# Altium PCB PCB1.PcbDoc
Units mm, origin at the board's own origin, x right, y up, seen from the top; angles counter-clockwise.
Board outline 20 x 45 mm, 2 copper layers (Top Layer, Bottom Layer); 9 components, 5 nets, 27 pads, 5 vias.
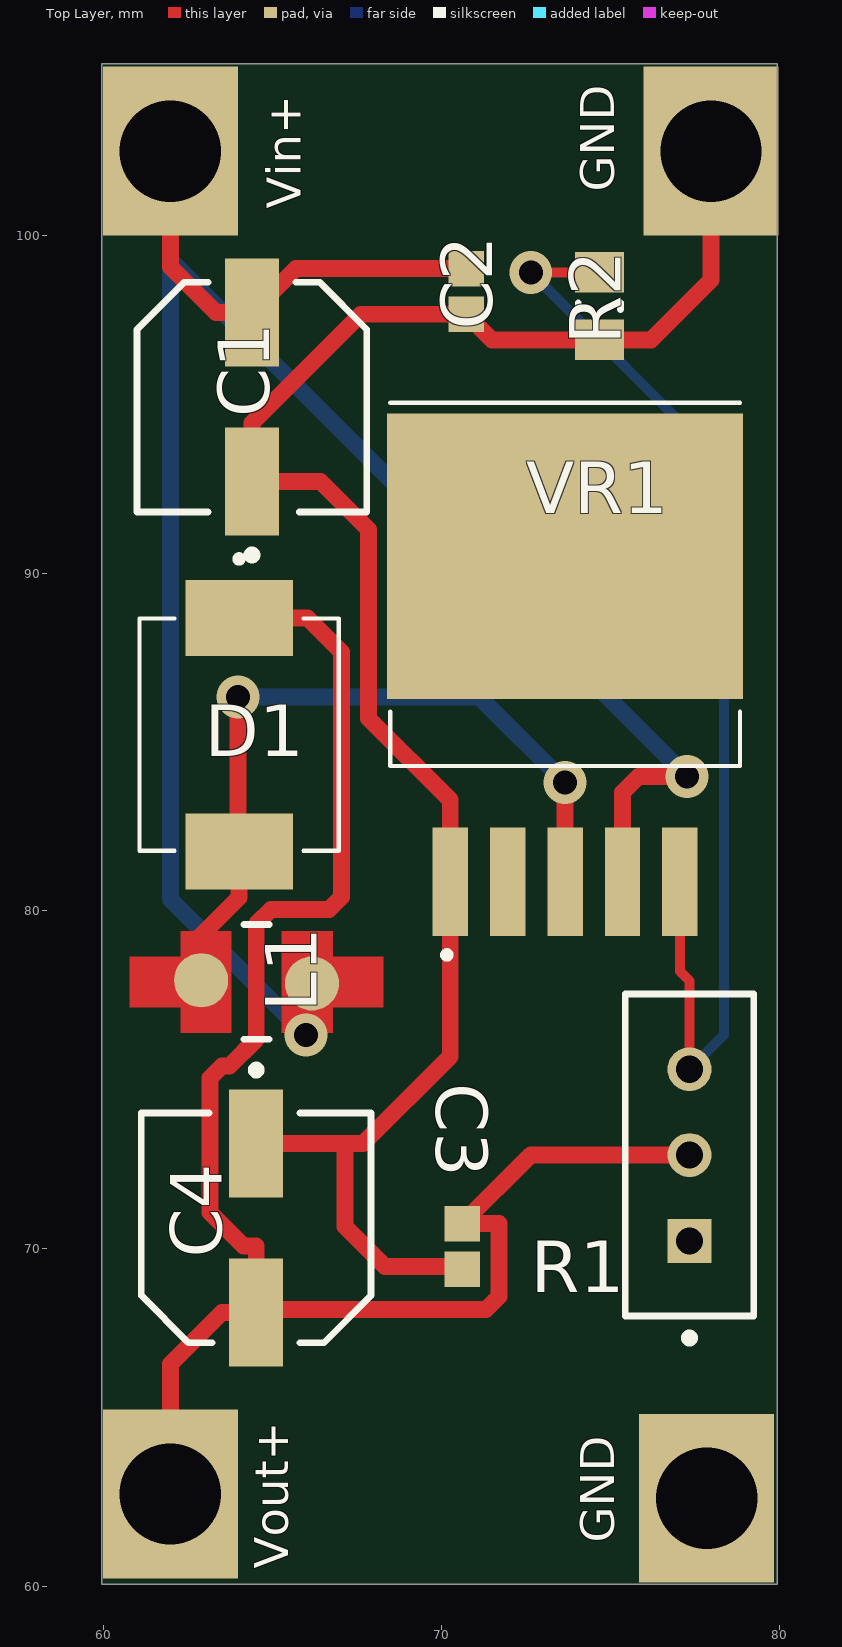
[diagram p0: Top Layer view]
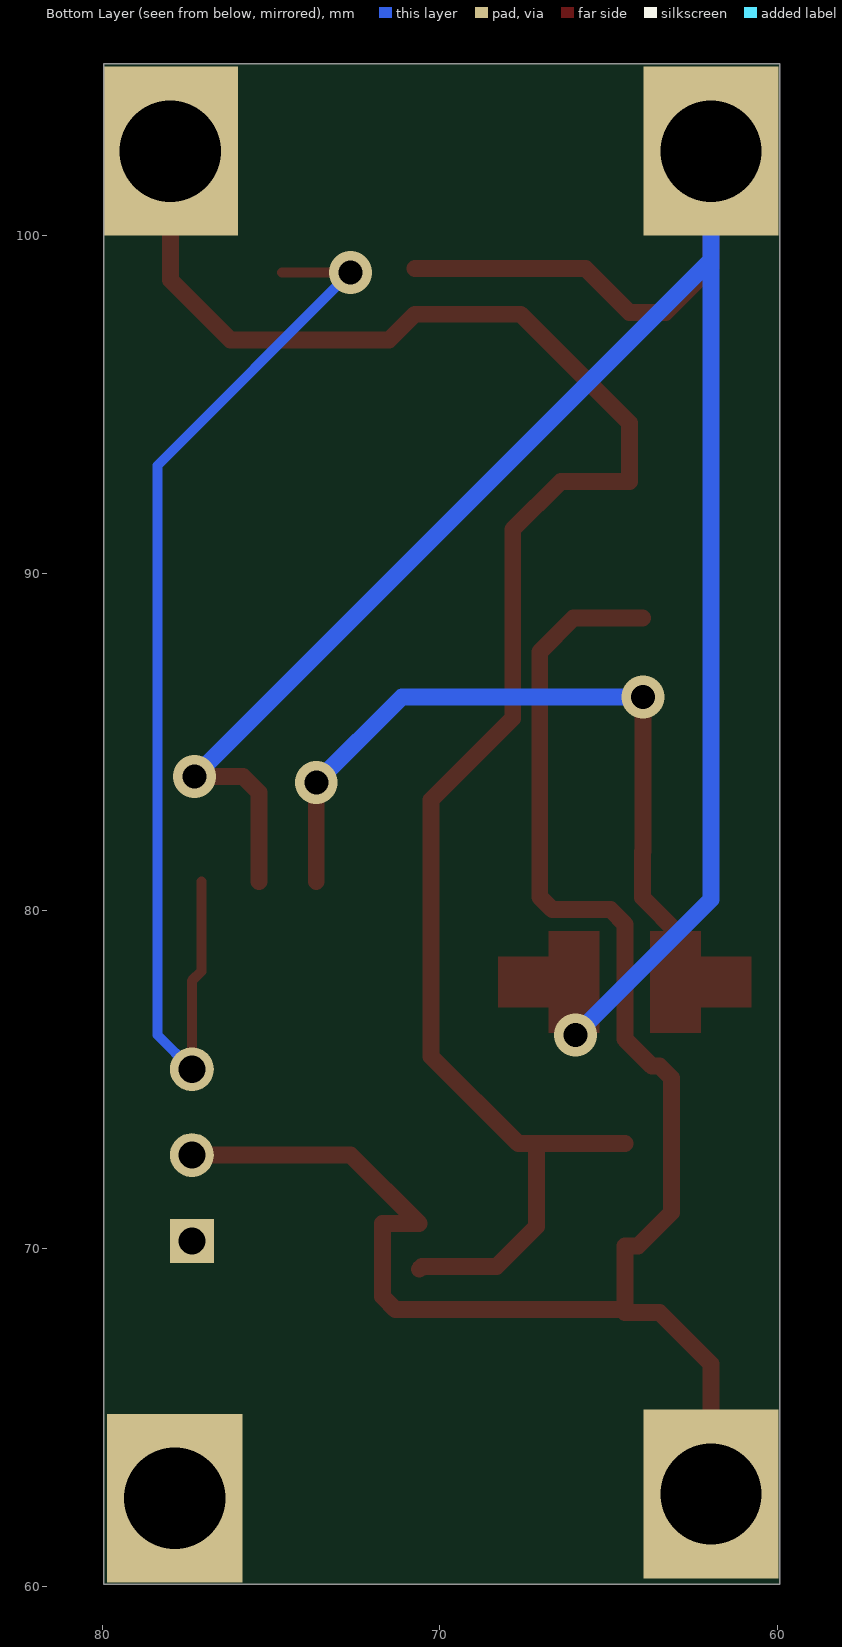
[diagram p1: Bottom Layer view, seen from below]
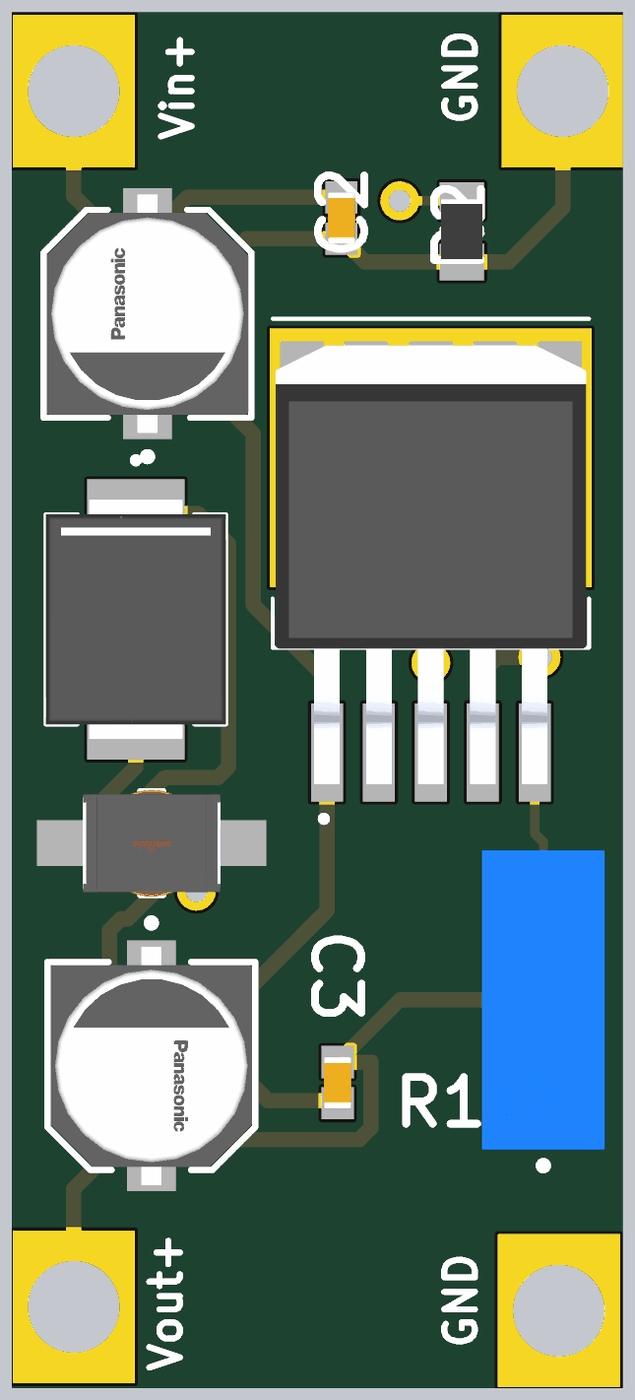
[diagram p2: 3D render of the assembled board from above, using the file's embedded part models]

## Layer stack, top to bottom
Top Solder: solder mask 0.0102, Solder Resist, Dk 3.5
Top Layer: signal copper 0.0356
Dielectric 1: dielectric 0.32, FR-4, Dk 4.8
Bottom Layer: signal copper 0.0356
Bottom Solder: solder mask 0.0102, Solder Resist, Dk 3.5

## Board outline
59.944,60.071 59.944,105.071 79.944,105.071 79.944,60.071

## Design rules (kind name [scope] priority, off if disabled: settings)
Clearance [All] p1: gap=0.3 ignorepadtopadclearanceinfootprint=FALSE
PolygonConnect [All] p1: connectstyle=Relief reliefconductorwidth=0.254 reliefentries=4 polygonreliefangle="90 Angle" airgapwidth=0.254
RoutingVias [All] p1: holewidth=0.711 width=1.27 viastyle="Through Hole" minholewidth=0.711 minwidth=1.27 maxholewidth=0.711 maxwidth=1.27
SolderMaskExpansion [All] p1: expansion=0.102 istentingtop=FALSE
Width pownets [(InNet('GND') OR InNet('SW') OR InNet('vin+') OR InNet('vout+'))] p1: maxlimit=1 minlimit=0.254 preferedwidth=0.5
Width [All] p2: maxlimit=1 minlimit=0.254 preferedwidth=0.3
30 further rules are at their usual default settings.

## Components (designator, comment, footprint, x,y, rotation, side; value= is the part's Value field where it differs from the comment)
C1 "47uF" FP-FPD-MFG 64.389,95.21 r90 top
C2 "105" CAPC1608X90X40ML10T20 70.739,98.338 r90 top
C3 "105" CAPC1608X90X40ML10T20 70.612,70.064 r90 top
C4 "47uF" FP-FPD-MFG 64.516,70.612 r270 top
D1 "SS34" DIOM7959X265N 64.008,85.217 r270 top
L1 "33uH" FP-LQH43CN_03-MFG 64.526,77.898 r180 top
R1 "13.8k" BOUR-3290W 77.343,72.771 r90 top
R2 "1K" RESC2013X60X35ML10T20 74.676,97.901 r90 top
VR1 "XL6009" DPAK170P1435X465-6N 73.66,86.995 r90 top

## Footprints (in the part's own frame and the unit in brackets; to place one, negate y for a bottom-side part, rotate by r counter-clockwise, add the part's x,y. Pads: shape width x height; smd on the part's side, far side on the other; paste and mask are expansions set on the pad)
BOUR-3290W [mm] "THD, 3-Leads, Body 9.53x3.81mm, Pitch 2.54mm"
  rect 1.3x1.3 hole 0.8: 1(-2.54,0)
  round 1.3 hole 0.8: 2(0,0) 3(2.54,0)
  silkscreen extent -5.54,-1.91 4.76,1.91, body extent -4.89,-2.01 4.89,2.01, height 10.86
CAPC1608X90X40ML10T20 [mm] "Chip Capacitor, 2-Leads, Body 1.7x0.9mm, IPC Low Density"
  rect 1.05x1.05 smd: 1(-0.675,0) 2(0.675,0)
  body extent -0.85,-0.45 0.85,0.45, height 0.9
DIOM7959X265N [mm]
  rect 2.25x3.18 smd: A(3.455,0) C(-3.455,0)
  silkscreen extent -5.3,-2.95 3.44,2.95, body extent -3.98,-2.95 3.98,2.95, height 1.2
DPAK170P1435X465-6N [mm]
  rect 3.21x1.05 smd: 1(-6.13,3.4) 2(-6.13,1.7) 3(-6.13,0) 4(-6.13,-1.7) 5(-6.13,-3.4)
  rect 8.46x10.53 smd paste-6: 6(3.5,0)
  silkscreen extent -8.4,-5.18 8.05,5.18, body extent -7.17,-5.08 7.17,5.08, height 4.65
FP-FPD-MFG [mm]
  rect 3.2x1.6 smd paste+0 mask+0: 1(-2.5,0) 2(2.5,0)
  silkscreen extent -4.8,-3.4 3.4,3.4, body extent -4.35,-3.65 4.35,3.65, height 0.25
FP-LQH43CN_03-MFG [mm]
  round 1.603 smd paste+0 mask+0: 1(-1.641,0.047) 2(1.641,-0.047)
  Top Layer region: 3.75,0.75 2.25,0.75 2.25,1.5 0.75,1.5 0.75,-1.5 2.25,-1.5 2.25,-0.75 3.75,-0.75 3.75,0.75
  Top Layer region: -3.75,0.75 -2.25,0.75 -2.25,1.5 -0.75,1.5 -0.75,-1.5 -2.25,-1.5 -2.25,-0.75 -3.75,-0.75 -3.75,0.75
  silkscreen extent -0.37,-1.7 0.38,1.7, body extent -3.85,-1.8 3.85,1.8, height 0.25
RESC2013X60X35ML10T20 [mm] "Chip Resistor, 2-Leads, Body 2.1x1.35mm, IPC Low Density"
  rect 1.2x1.45 smd: 1(-1,0) 2(1,0)
  silkscreen extent -0.1,-0.62 0.1,0.62, body extent -1.05,-0.68 1.05,0.67, height 0.6

## Part data
C1 C4: library part CMP-2000-06216-2, "CAP ALUM 47UF 20% 35V SMD", Case/Package=Radial, ESR (Equivalent Series Resistance)=260mR, Leakage Current=3uA, Max Operating Temperature=105°C, Min Operating Temperature=-55°C, Package Quantity=1, Ripple Current=300mA, Tolerance=20%, Voltage=35V, Capacitance=47uF, Construction=Cylindrical, Contact Plating=Tin, Diameter=6.3mm, Dissipation Factor=0.12%, Height=5.8mm, Height - Seated (Max)=0.228inch, Lead Free="Lead Free", Lead Pitch=1.8mm, Length=5.8mm, Life (Hours)=2000Hour, Material=Aluminium, Mount="Surface Mount", Number of Pins=2, Packaging="Tape and Reel", Radiation Hardening=No, REACH SVHC="No SVHC", Ripple Current (AC)=300mA, RoHS Compliant=Yes, Series=FP, Termination=SMD/SMT, Voltage Rating=35V, Voltage Rating (DC)=35V
C2 C3: library part CMP-2100-03594-1, "Chip Capacitor, 100 pF, +/- 5%, 50 V, -55 to 125 degC, 0603 (1608 Metric), RoHS, Tape and Reel", Capacitance=100pF, Case Code (Imperial)=0603, Case Code (Metric)=1608, Dielectric=C0G, Insulation Resistance=100GR, Manufacturer=Yageo, Max Operating Temperature=125degC, Min Operating Temperature=-55degC, Package Description="2-Pin Surface Mount Device, Body 1.6 x 0.8 mm", Package Quantity=1, Temperature Coefficient=30ppm/degC, Tolerance=5%, Voltage=50V, Case/Package=0603, Composition=Ceramic, Datasheet URL=http://www.yageo.com/documents/recent/UPY-GP_NP0_16V-to-50V_14.pdf, Datasheet Version="Rev. 14, 07/2016", Depth=0.8mm, Height=0.8mm, Lead Free=LeadFree, Length=1.6mm, Manufacturer URL=http://www.yageo.com/, Mount=SurfaceMount, Number of Pins=2, Package Reference=0603, Packaging=TapeandReel, Radiation Hardening=No, REACH SVHC=Unknown, RoHSCompliant=True, Termination=SMD/SMT, Thickness=0.035inch, Voltage Rating=50V, Voltage Rating (DC)=50V, Width=0.8mm
D1: "Diode Schottky 40 V 3A Surface Mount SMC (DO-214AB)", Package="SMC-2 ON Semiconductor", Availability="In Stock", Check_prices=https://www.snapeda.com/parts/SS34/Onsemi/view-part/?ref=eda, MF="ON Semiconductor", MP=SS34, Price=None, SnapEDA_Link=https://www.snapeda.com/parts/SS34/Onsemi/view-part/?ref=snap
L1: library part CMP-06042-007035-1, "Wire Wound Ferrite Inductor for General Circuits 10μH ±10% 0.56Ω 400mA 1812", Case Code (Imperial)=1812, Case Code (Metric)=4532, Current=360mA, Current Rating=400mA, DC Resistance (DCR)=560mR, Frequency=23MHz, Inductance=10uH, Inductance Tolerance=10%, Max Operating Temperature=85°C, Min Operating Temperature=-40°C, Package Quantity=500, Test Frequency=1MHz, Case/Package=1812, Core Material=Ferrite, DC Current=400mA, Depth=3.4mm, Height=2.6mm, Lead Free="Lead Free", Length=4.5mm, Max DC Current=400mA, Military Standard=Not, Mount="Surface Mount", Packaging="Tape and Reel", Q Factor=35, Radiation Hardening=No, REACH SVHC="No SVHC", Self Resonant Frequency=23MHz, Series Resistance=560mR, Shielding=Unshielded, Termination=SMD/SMT, Tolerance=10%, Weight=0.004586oz, Width=3.2mm
R1: library part CMP-2000-05581-1, "Trimming Potentiometer, 20 KOhm, 1 W, -65 to 150 degC, 3-Pin THD, RoHS, Tube", Manufacturer=Bourns, Package Description="3-Pin Through Hole Device, Body 9.53 x 3.81 mm, Pitch 2.54 mm", Package Reference=3290W, Power Rating=1W, Resistance Tolerance=±5%, Temperature Coefficient=±50ppm/°C, Track Resistance=20kohm, Datasheet URL=http://www.bourns.com/docs/Product-Datasheets/3290.pdf, Datasheet Version=04/2014, Manufacturer URL=http://www.bourns.com/, Mounting Technology=ThroughHole, No. of Turns=25, Potentiometer Mounting=ThroughHole, Product Range=AEC-Q2003290WSeries, SVHC=NoSVHC(15-Jun-2015)
R2: library part CMP-2100-03671-1, "Chip Resistor, 1 KOhm, +/- 1%, 125 mW, -55 to 155 degC, 0805 (2012 Metric), RoHS, Tape and Reel", Case Code (Imperial)=0805, Case Code (Metric)=2012, Manufacturer=Yageo, Max Operating Temperature=155degC, Max Power Dissipation=125mW, Min Operating Temperature=-55degC, Package Description="2-Pin Surface Mounted Device, Body 2 x 1.25 mm", Package Quantity=1, Resistance=1KOhm, Temperature Coefficient=100ppm/degreesC, Tolerance=1%, Voltage Rating=150V, Case/Package=0805, Composition=ThickFilm, Datasheet URL=http://www.yageo.com/NewPortal/yageodocoutput?fileName=/pdf/R-Chip/PYu-RC_Group_51_RoHS_L_5.pdf, Datasheet Version="Rev. 5, 10/2016", Depth=1.25mm, Height=0.024inch, Lead Free=LeadFree, Length=0.079inch, Manufacturer URL=http://www.yageo.com/, Military Standard=Not, Number of Pins=2, Number of Terminations=2, Package Reference=0805, Packaging=TapeandReel, Power Rating=125mW, REACH SVHC=Unknown, RoHSCompliant=true, Termination=SMD/SMT, Voltage Rating (DC)=150V, Width=0.049inch
VR1: "The XL6009 regulator is a wide input range, current mode, DC/DC converter which is capable of generating either positive or negative output voltages.", Package="TO-263-5L XLSEMI", Availability="Not in stock", Check_prices=https://www.snapeda.com/parts/XL6009/XLSEMI/view-part/?ref=eda, MF=XLSEMI, MP=XL6009, Price=None, SnapEDA_Link=https://www.snapeda.com/parts/XL6009/XLSEMI/view-part/?ref=snap

## Free pads (board coordinates)
  rect 4x5 hole 3: 4(61.976,62.738) 4(61.976,102.489) 4(77.851,62.611) 4(77.978,102.489)

## Via types
v1: diameter 1.27, hole 0.711, Top Layer to Bottom Layer, 5 vias

## Nets (pads, with @x,y where several pads share a name; then routed paths per layer and width w, separated by ;. In a path a pad name is that pad's centre, name@x,y a point inside that pad or via, vN(x,y) a via of type N, cw(c..) or ccw(c..) an arc to the next point about the centre after c; other vN are vias at no path point)
GND: C1.1 C2.1 C3.1 C4.1 pad.4@77.978,102.489 R2.1 VR1.1 | length 55.4
  Top Layer w0.5: C4.1 67.143,73.112 ; C3.1 70.532,69.469 68.326,69.469 67.143,70.652 67.143,73.112 ; pad.4@77.978,102.489 77.978,98.679 76.2,96.901 R2.1 71.501,96.901 C2.1 67.615,97.663 64.389,94.437 C1.1 66.421,92.71 67.845,91.286 67.845,85.7 70.26,83.285 VR1.1 70.26,75.692 67.68,73.112 67.143,73.112
NetR1_3: R1.3 R2.2 VR1.5 | length 34.1
  Top Layer w0.3: v1(72.644,98.901) R2.2 ; VR1.5 77.06,78.21 77.343,77.927 R1.3
  Bottom Layer w0.3: v1(72.644,98.901) 78.359,93.186 78.359,76.327 R1.3
SW: D1.A L1.2 VR1.3 | length 22.5
  Top Layer w0.5: L1.2 62.886,79.273 64.008,80.396 D1.A 63.983,81.762 v1(63.983,86.335) ; VR1.3 v1(73.66,83.795)
  Bottom Layer w0.5: v1(63.983,86.335) 71.12,86.335 v1(73.66,83.795)
vin+: C1.2 C2.2 L1.1 pad.4@61.976,102.489 VR1.4 | length 69.1
  Top Layer w0.5: pad.4@61.976,102.489 61.976,99.06 63.326,97.71 C1.2 65.692,99.013 C2.2 ; v1(65.989,76.327) 66.167,76.505 L1.1 ; VR1.4 75.36,83.502 75.83,83.972 v1(77.267,83.972)
  Bottom Layer w0.5: pad.4@61.976,102.489 61.976,99.263 ; v1(65.989,76.327) 61.976,80.34 61.976,99.263 ; v1(77.267,83.972) 61.976,99.263
vout+: C3.2 C4.2 D1.C pad.4@61.976,62.738 R1.2 | length 51.8
  Top Layer w0.5: pad.4@61.976,62.738 61.976,66.588 63.5,68.112 C4.2 C4.2@64.516,68.199 ; D1.C 66.04,88.672 67.045,87.667 67.045,80.405 66.675,80.035 64.948,80.035 64.516,79.604 64.516,76.2 63.729,75.413 63.5,75.413 63.144,75.057 63.144,71.069 64.135,70.079 64.516,70.079 C4.2@64.516,68.199 ; R1.2 72.644,72.771 C3.2 71.704,70.739 71.704,68.58 71.323,68.199 C4.2@64.516,68.199
pads on no net: R1.1 VR1.2 VR1.6

## Silkscreen, mask and mechanical layers (free items; w line width, h text height)
Top Overlay:
  text "GND" at 75.111,101.292 h1 r90
  text "Vin+" at 65.84,100.784 h1 r90
  text "GND" at 75.111,61.287 h1 r90
  text "Vout+" at 65.459,60.525 h1 r90